# Altium PCB Led.PcbDoc
Units mm, origin at the board's own origin, x right, y up, seen from the top; angles counter-clockwise.
Board outline 57.99 x 26 mm, 2 copper layers (Top Layer, Bottom Layer); 3 components, 4 nets, 13 pads, 0 vias.
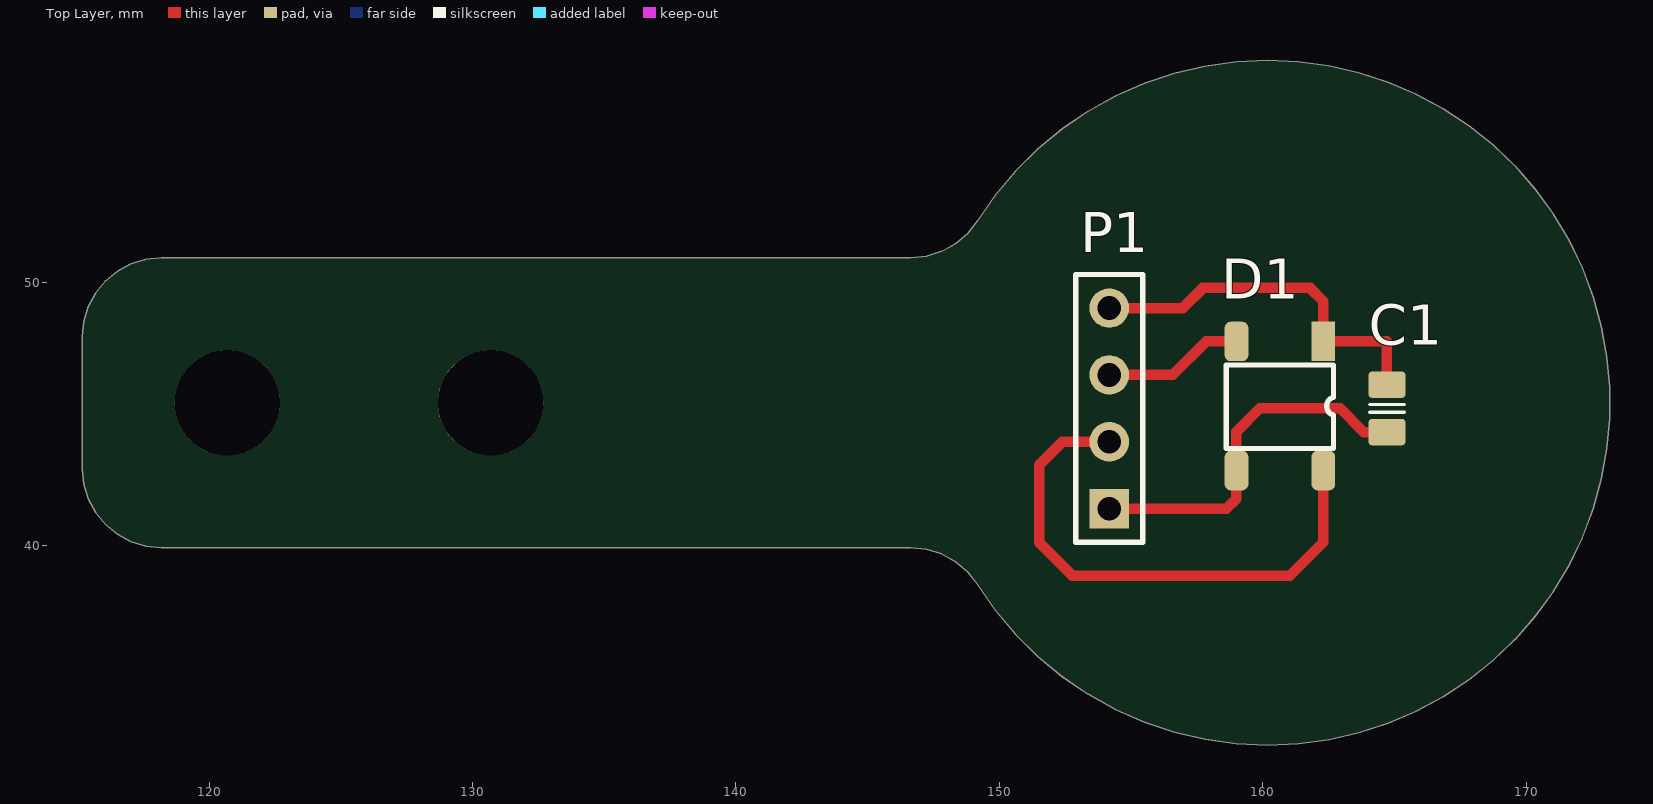
[diagram p0: Top Layer view]
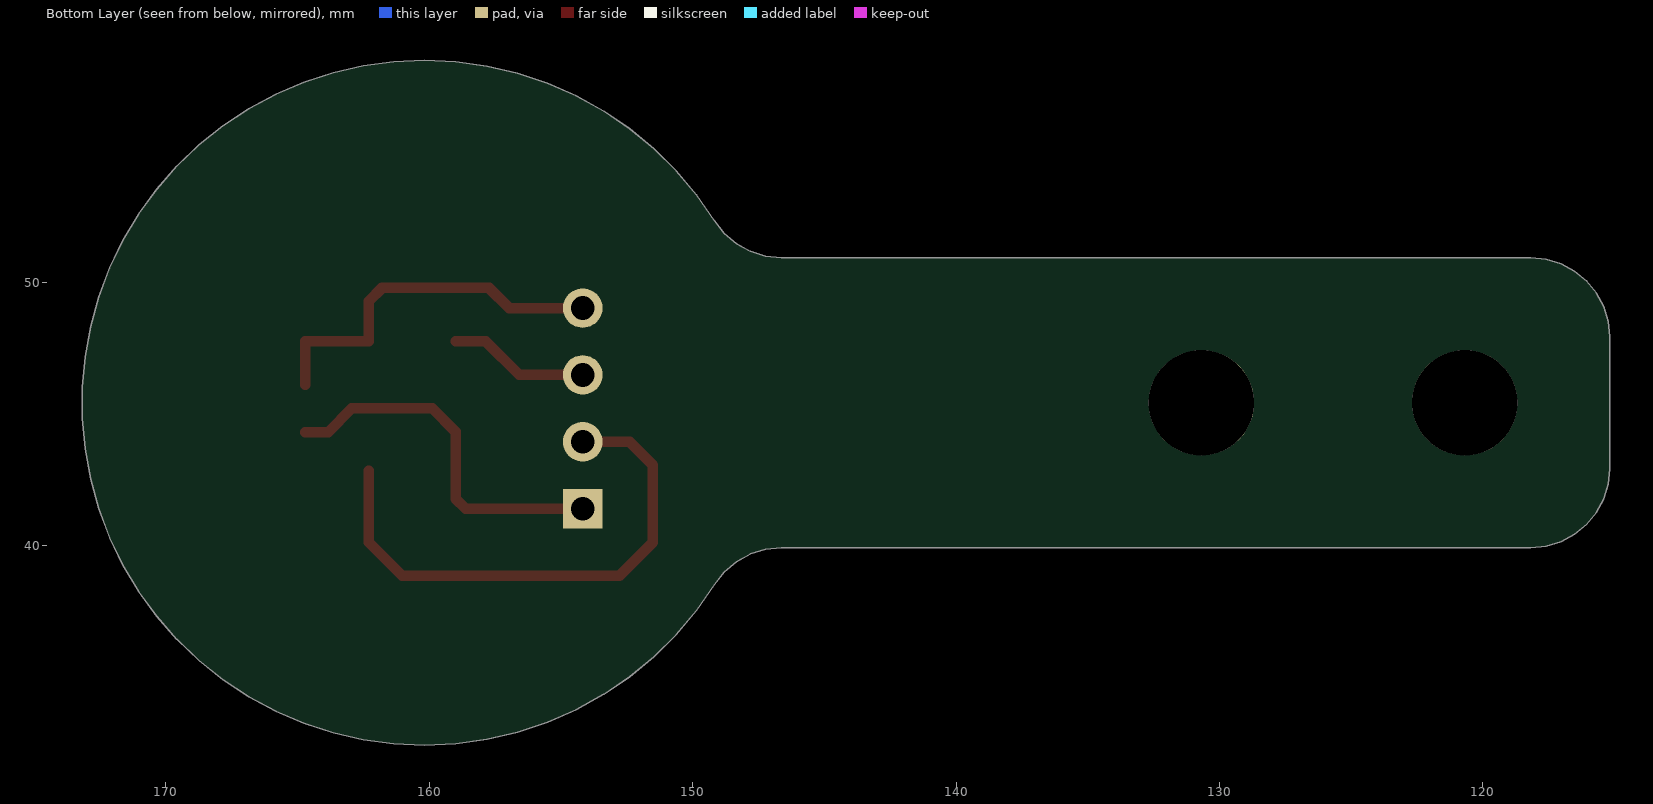
[diagram p1: Bottom Layer view, seen from below]

## Layer stack, top to bottom
Top Layer: signal copper 0.0356
Dielectric: dielectric 0.32, FR-4, Dk 4.8
Bottom Layer: signal copper 0.0356

## Board outline
115.189,42.927 115.247,42.342 115.417,41.779 115.695,41.26 116.068,40.806 116.522,40.433 117.041,40.155 117.604,39.985 118.189,39.927 146.634,39.927 147.236,39.866 147.814,39.685 148.343,39.392 148.803,38.999 149.175,38.521 149.855,37.539 150.623,36.624 151.471,35.784 152.392,35.025 153.38,34.353 154.424,33.775 155.518,33.295 156.651,32.918 157.813,32.646 158.996,32.482 160.189,32.427 161.354,32.479 162.51,32.636 163.647,32.895 164.757,33.256 165.829,33.714 166.857,34.267 167.83,34.91 168.742,35.637 169.585,36.443 170.353,37.322 171.038,38.265 171.637,39.267 172.143,40.318 172.553,41.41 172.863,42.534 173.071,43.682 173.176,44.844 173.176,46.01 173.071,47.172 172.863,48.32 172.553,49.444 172.143,50.536 171.637,51.587 171.038,52.589 170.353,53.532 169.585,54.411 168.742,55.217 167.83,55.944 166.857,56.587 165.829,57.14 164.757,57.598 163.647,57.959 162.51,58.218 161.354,58.375 160.189,58.427 158.996,58.372 157.813,58.208 156.651,57.936 155.518,57.559 154.424,57.079 153.38,56.501 152.392,55.829 151.471,55.07 150.623,54.23 149.855,53.315 149.175,52.333 148.803,51.855 148.343,51.462 147.814,51.169 147.236,50.988 146.634,50.927 118.189,50.927 117.604,50.869 117.041,50.699 116.522,50.421 116.068,50.048 115.695,49.594 115.417,49.075 115.247,48.512 115.189,47.927

## Design rules (kind name [scope] priority, off if disabled: settings)
Clearance [All] p1: gap=0.254
PolygonConnect [All] p1: connectstyle=Relief reliefconductorwidth=0.254 reliefentries=4 polygonreliefangle="90 Angle" airgapwidth=0.254
RoomDefinition Led [InComponentClass('Led')] p1: confinementstyle=ConfineIn formatcopy=TRUE lockcomponents=FALSE outline 178.943,26.924 194.564,26.924 194.564,40.132 178.943,40.132
RoutingVias [All] p1: holewidth=0.711 width=1.27 viastyle="Through Hole" minholewidth=0.711 minwidth=1.27 maxholewidth=0.711 maxwidth=1.27
SolderMaskExpansion [All] p1: expansion=0.102
Width [All] p1: maxlimit=0.4 minlimit=0.4 preferedwidth=0.4
28 further rules are at their usual default settings.

## Components (designator, comment, footprint, x,y, rotation, side; value= is the part's Value field where it differs from the comment)
C1 "approved sub OK" CAPC2012X135N 164.719,45.212 r270 top
D1 "WS2812B" 5050LED 162.306,47.752 r270 top
P1 "Header 4" HDR1X4 154.178,41.402 r90 top

## Footprints (in the part's own frame and the unit in brackets; to place one, negate y for a bottom-side part, rotate by r counter-clockwise, add the part's x,y. Pads: shape width x height; smd on the part's side, far side on the other; paste and mask are expansions set on the pad)
5050LED [mm]
  rect 1.5x0.9 smd: 1(0,0)
  rrect50% 1.5x0.9 smd: 2(0,-3.3) 3(4.9,-3.3) 4(4.9,0)
  silkscreen extent 0.89,-3.68 4.06,0.38
CAPC2012X135N [mm] "Chip Capacitor, Body 2.0x1.2mm, EIA 0805, IPC Medium Density"
  round 0.254 on Mech15: 0(0,0)
  rrect25% 1x1.4 smd: 1(-0.9,0) 2(0.9,0)
  Top Layer pour cut-out: -0.675,0.7 -0.475,0.9 0.475,0.9 0.675,0.7 0.675,-0.7 0.475,-0.9 -0.475,-0.9 -0.675,-0.7
  silkscreen extent -0.15,-0.65 0.15,0.65, body extent -1.1,-0.72 1.1,0.73, height 1.34
HDR1X4 [mm] "Connector; Header; 4 Position"
  rect 1.5x1.5 hole 0.9: 1(0,0)
  round 1.5 hole 0.9: 2(2.54,0) 3(5.08,0) 4(7.62,0)
  silkscreen extent -1.27,-1.27 8.89,1.27

## Part data
C1: library part CAPC_100n_0805_X7R_50V_10%, "Capacitor SMD Cer 100nF 10% 50V X7R 0805"
D1: "WS2812B RGB LED"
P1: "Header, 4-Pin"

## Free pads (board coordinates)
  round 4 hole 4: 1(120.689,45.427) 1(130.689,45.427)

## Nets (pads, with @x,y where several pads share a name; then routed paths per layer and width w, separated by ;. In a path a pad name is that pad's centre, name@x,y a point inside that pad or via, vN(x,y) a via of type N, cw(c..) or ccw(c..) an arc to the next point about the centre after c; other vN are vias at no path point)
DIN: D1.4 P1.2 | length 20.5
  Top Layer w0.4: P1.2 152.4,43.942 151.511,43.053 151.511,40.132 152.781,38.862 161.036,38.862 162.306,40.132 D1.4
DOUT: D1.2 P1.3 | length 5.4
  Top Layer w0.4: P1.3 156.591,46.482 157.861,47.752 D1.2
GND: C1.2 D1.3 P1.1 | length 14
  Top Layer w0.4: P1.1 158.623,41.402 159.006,41.785 D1.3 159.006,44.325 159.893,45.212 162.941,45.212 163.841,44.312 C1.2
VCC: C1.1 D1.1 P1.4 | length 14.2
  Top Layer w0.4: P1.4 156.972,49.022 157.734,49.784 161.798,49.784 162.306,49.276 D1.1 164.719,47.752 C1.1
pads on no net: C1.0